# Altium PCB Print3.PcbDoc
Units mm, origin at the board's own origin, x right, y up, seen from the top; angles counter-clockwise.
Board outline 237.62 x 189.1 mm, 2 copper layers (Top Layer, Bottom Layer); 90 components, 0 nets, 288 pads, 0 vias.
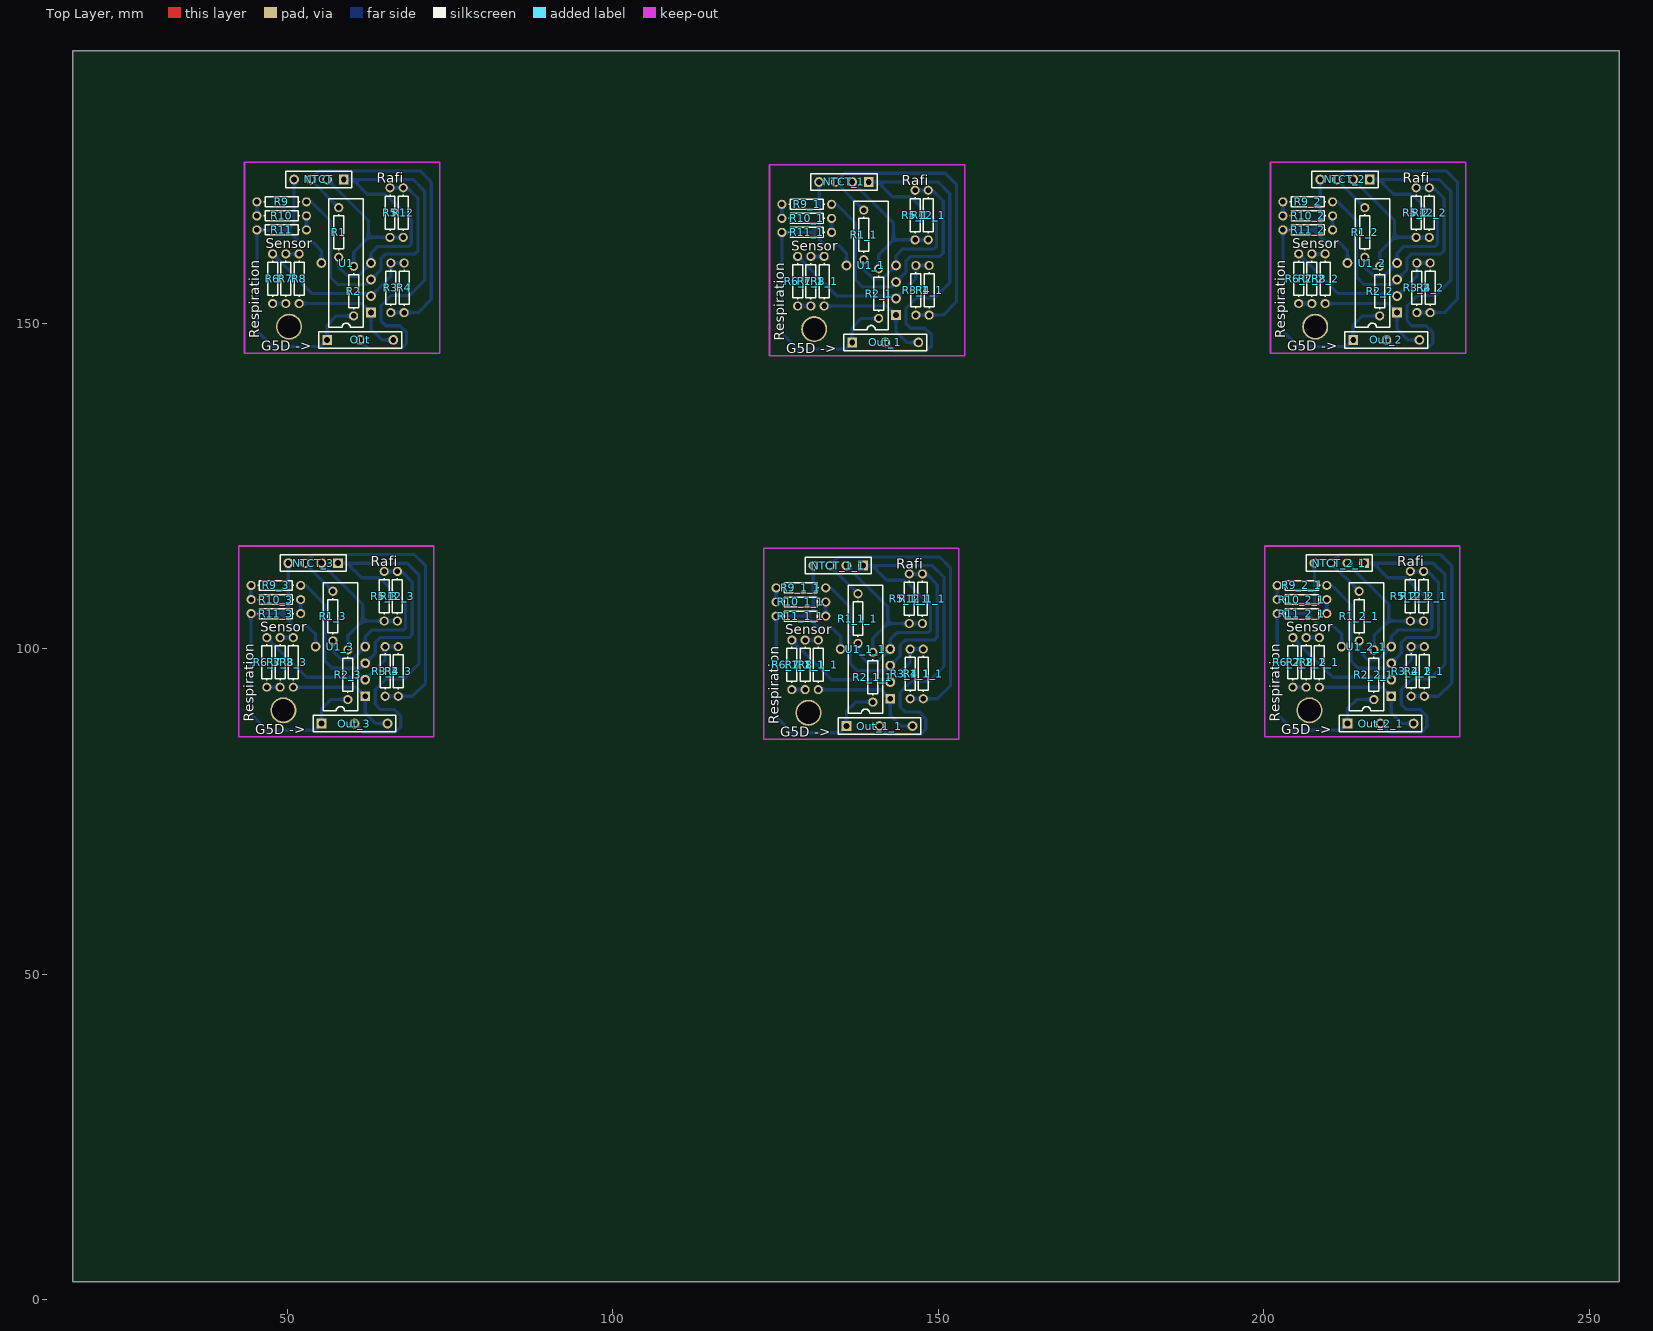
[diagram p0: Top Layer view]
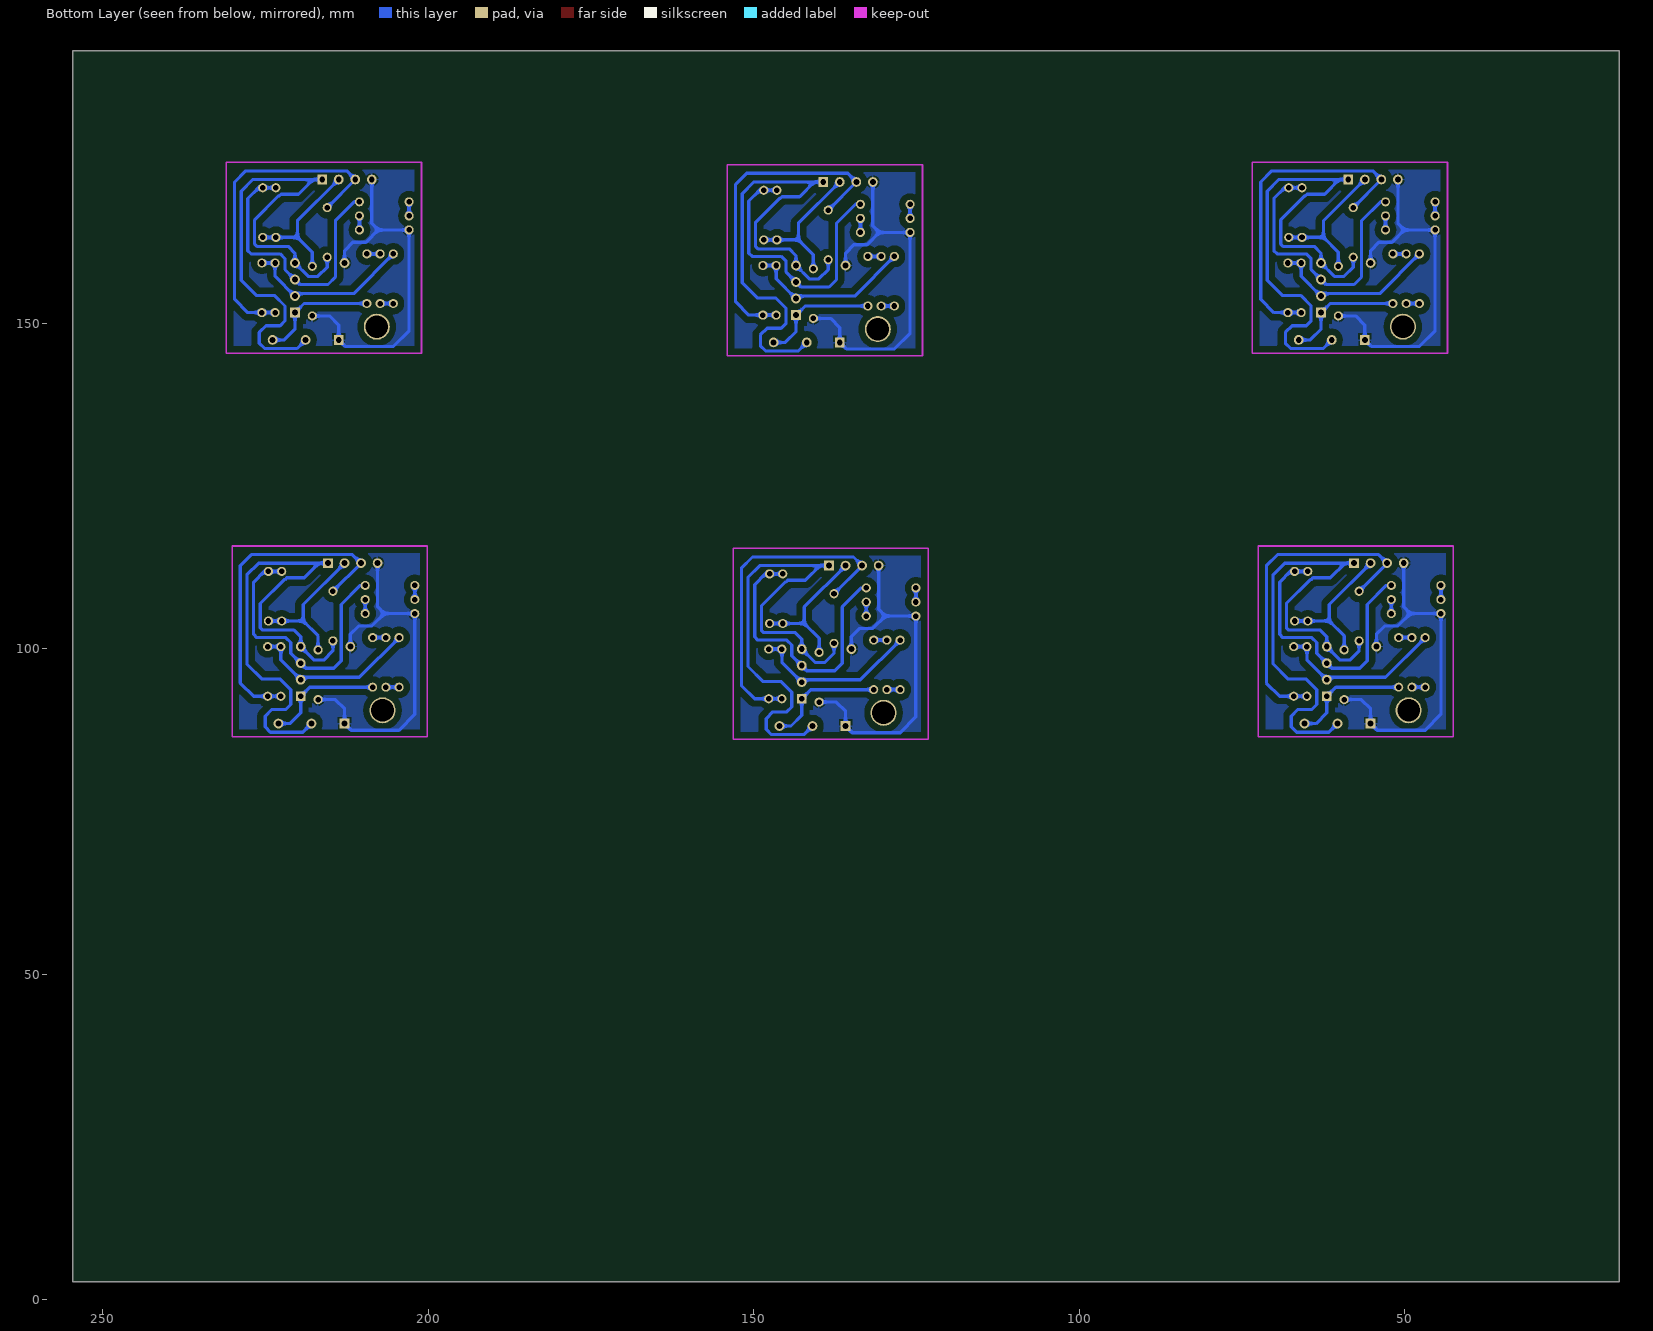
[diagram p1: Bottom Layer view, seen from below]

## Layer stack, top to bottom
Top Solder: solder mask 0.0102, Solder Resist, Dk 3.5
Top Layer: signal copper 0.0356
Dielectric 1: dielectric 0.32, FR-4, Dk 4.8
Bottom Layer: signal copper 0.0356
Bottom Solder: solder mask 0.0102, Solder Resist, Dk 3.5

## Board outline
17.018,2.794 17.018,191.897 254.635,191.897 254.635,2.794

## Design rules (kind name [scope] priority, off if disabled: settings)
Clearance [All] p1: gap=0.25
PolygonConnect [All] p1: connectstyle=Relief reliefconductorwidth=0.254 reliefentries=4 polygonreliefangle="90 Angle" airgapwidth=0.254
RoutingVias [All] p1: holewidth=0.711 width=1.27 viastyle="Through Hole" minholewidth=0.711 minwidth=1.27 maxholewidth=0.711 maxwidth=1.27
SolderMaskExpansion [All] p1: expansion=0.102
Width [All] p1: maxlimit=3 minlimit=0.254 preferedwidth=1
30 further rules are at their usual default settings.

## Components (designator, comment, footprint, x,y, rotation, side; value= is the part's Value field where it differs from the comment)
NTCT "Header 4" HDR1X4 58.674,172.085 r180 top
NTCT_1 "Header 4" HDR1X4 139.319,171.704 r180 top (schematic designator NTCT)
NTCT_1_1 "Header 4" HDR1X4 138.43,112.776 r180 top (schematic designator NTCT)
NTCT_2 "Header 4" HDR1X4 216.281,172.085 r180 top (schematic designator NTCT)
NTCT_2_1 "Header 4" HDR1X4 215.392,113.157 r180 top (schematic designator NTCT)
NTCT_3 "Header 4" HDR1X4 57.785,113.157 r180 top (schematic designator NTCT)
Out "Header 5" HDR1X5 56.134,147.447 r0 top
Out_1 "Header 5" HDR1X5 136.779,147.066 r0 top (schematic designator Out)
Out_1_1 "Header 5" HDR1X5 135.89,88.138 r0 top (schematic designator Out)
Out_2 "Header 5" HDR1X5 213.741,147.447 r0 top (schematic designator Out)
Out_2_1 "Header 5" HDR1X5 212.852,88.519 r0 top (schematic designator Out)
Out_3 "Header 5" HDR1X5 55.245,88.519 r0 top (schematic designator Out)
R1 "10K" AXIAL-0.3 57.912,163.957 r270 top
R1_1 "10K" AXIAL-0.3 138.557,163.576 r270 top (schematic designator R1)
R1_1_1 "10K" AXIAL-0.3 137.668,104.648 r270 top (schematic designator R1)
R1_2 "10K" AXIAL-0.3 215.519,163.957 r270 top (schematic designator R1)
R1_2_1 "10K" AXIAL-0.3 214.63,105.029 r270 top (schematic designator R1)
R1_3 "10K" AXIAL-0.3 57.023,105.029 r270 top (schematic designator R1)
R2 "10K" AXIAL-0.3 60.198,154.94 r270 top
R2_1 "10K" AXIAL-0.3 140.843,154.559 r270 top (schematic designator R2)
R2_1_1 "10K" AXIAL-0.3 139.954,95.631 r270 top (schematic designator R2)
R2_2 "10K" AXIAL-0.3 217.805,154.94 r270 top (schematic designator R2)
R2_2_1 "10K" AXIAL-0.3 216.916,96.012 r270 top (schematic designator R2)
R2_3 "10K" AXIAL-0.3 59.309,96.012 r270 top (schematic designator R2)
R3 "10" AXIAL-0.3 65.913,155.448 r90 top
R3_1 "10" AXIAL-0.3 146.558,155.067 r90 top (schematic designator R3)
R3_1_1 "10" AXIAL-0.3 145.669,96.139 r90 top (schematic designator R3)
R3_2 "10" AXIAL-0.3 223.52,155.448 r90 top (schematic designator R3)
R3_2_1 "10" AXIAL-0.3 222.631,96.52 r90 top (schematic designator R3)
R3_3 "10" AXIAL-0.3 65.024,96.52 r90 top (schematic designator R3)
R4 "10" AXIAL-0.3 67.945,155.448 r90 top
R4_1 "10" AXIAL-0.3 148.59,155.067 r90 top (schematic designator R4)
R4_1_1 "10" AXIAL-0.3 147.701,96.139 r90 top (schematic designator R4)
R4_2 "10" AXIAL-0.3 225.552,155.448 r90 top (schematic designator R4)
R4_2_1 "10" AXIAL-0.3 224.663,96.52 r90 top (schematic designator R4)
R4_3 "10" AXIAL-0.3 67.056,96.52 r90 top (schematic designator R4)
R5 "10" AXIAL-0.3 65.786,167.005 r90 top
R5_1 "10" AXIAL-0.3 146.431,166.624 r90 top (schematic designator R5)
R5_1_1 "10" AXIAL-0.3 145.542,107.696 r90 top (schematic designator R5)
R5_2 "10" AXIAL-0.3 223.393,167.005 r90 top (schematic designator R5)
R5_2_1 "10" AXIAL-0.3 222.504,108.077 r90 top (schematic designator R5)
R5_3 "10" AXIAL-0.3 64.897,108.077 r90 top (schematic designator R5)
R6 "10K" AXIAL-0.3 47.752,156.845 r270 top
R6_1 "10K" AXIAL-0.3 128.397,156.464 r270 top (schematic designator R6)
R6_1_1 "10K" AXIAL-0.3 127.508,97.536 r270 top (schematic designator R6)
R6_2 "10K" AXIAL-0.3 205.359,156.845 r270 top (schematic designator R6)
R6_2_1 "10K" AXIAL-0.3 204.47,97.917 r270 top (schematic designator R6)
R6_3 "10K" AXIAL-0.3 46.863,97.917 r270 top (schematic designator R6)
R7 "10K" AXIAL-0.3 49.784,156.845 r90 top
R7_1 "10K" AXIAL-0.3 130.429,156.464 r90 top (schematic designator R7)
R7_1_1 "10K" AXIAL-0.3 129.54,97.536 r90 top (schematic designator R7)
R7_2 "10K" AXIAL-0.3 207.391,156.845 r90 top (schematic designator R7)
R7_2_1 "10K" AXIAL-0.3 206.502,97.917 r90 top (schematic designator R7)
R7_3 "10K" AXIAL-0.3 48.895,97.917 r90 top (schematic designator R7)
R8 "10K" AXIAL-0.3 51.816,156.845 r270 top
R8_1 "10K" AXIAL-0.3 132.461,156.464 r270 top (schematic designator R8)
R8_1_1 "10K" AXIAL-0.3 131.572,97.536 r270 top (schematic designator R8)
R8_2 "10K" AXIAL-0.3 209.423,156.845 r270 top (schematic designator R8)
R8_2_1 "10K" AXIAL-0.3 208.534,97.917 r270 top (schematic designator R8)
R8_3 "10K" AXIAL-0.3 50.927,97.917 r270 top (schematic designator R8)
R9 "10K" AXIAL-0.3 49.149,168.656 r180 top
R9_1 "10K" AXIAL-0.3 129.794,168.275 r180 top (schematic designator R9)
R9_1_1 "10K" AXIAL-0.3 128.905,109.347 r180 top (schematic designator R9)
R9_2 "10K" AXIAL-0.3 206.756,168.656 r180 top (schematic designator R9)
R9_2_1 "10K" AXIAL-0.3 205.867,109.728 r180 top (schematic designator R9)
R9_3 "10K" AXIAL-0.3 48.26,109.728 r180 top (schematic designator R9)
R10 "10K" AXIAL-0.3 49.149,166.497 r0 top
R10_1 "10K" AXIAL-0.3 129.794,166.116 r0 top (schematic designator R10)
R10_1_1 "10K" AXIAL-0.3 128.905,107.188 r0 top (schematic designator R10)
R10_2 "10K" AXIAL-0.3 206.756,166.497 r0 top (schematic designator R10)
R10_2_1 "10K" AXIAL-0.3 205.867,107.569 r0 top (schematic designator R10)
R10_3 "10K" AXIAL-0.3 48.26,107.569 r0 top (schematic designator R10)
R11 "10K" AXIAL-0.3 49.149,164.338 r180 top
R11_1 "10K" AXIAL-0.3 129.794,163.957 r180 top (schematic designator R11)
R11_1_1 "10K" AXIAL-0.3 128.905,105.029 r180 top (schematic designator R11)
R11_2 "10K" AXIAL-0.3 206.756,164.338 r180 top (schematic designator R11)
R11_2_1 "10K" AXIAL-0.3 205.867,105.41 r180 top (schematic designator R11)
R11_3 "10K" AXIAL-0.3 48.26,105.41 r180 top (schematic designator R11)
R12 "10" AXIAL-0.3 67.818,167.005 r90 top
R12_1 "10" AXIAL-0.3 148.463,166.624 r90 top (schematic designator R12)
R12_1_1 "10" AXIAL-0.3 147.574,107.696 r90 top (schematic designator R12)
R12_2 "10" AXIAL-0.3 225.425,167.005 r90 top (schematic designator R12)
R12_2_1 "10" AXIAL-0.3 224.536,108.077 r90 top (schematic designator R12)
R12_3 "10" AXIAL-0.3 66.929,108.077 r90 top (schematic designator R12)
U1 "TL074N" N014 59.055,159.258 r90 top
U1_1 "TL074N" N014 139.7,158.877 r90 top (schematic designator U1)
U1_1_1 "TL074N" N014 138.811,99.949 r90 top (schematic designator U1)
U1_2 "TL074N" N014 216.662,159.258 r90 top (schematic designator U1)
U1_2_1 "TL074N" N014 215.773,100.33 r90 top (schematic designator U1)
U1_3 "TL074N" N014 58.166,100.33 r90 top (schematic designator U1)

## Footprints (in the part's own frame and the unit in brackets; to place one, negate y for a bottom-side part, rotate by r counter-clockwise, add the part's x,y. Pads: shape width x height; smd on the part's side, far side on the other; paste and mask are expansions set on the pad)
AXIAL-0.3 [mm] "Axial Device, Thru-Hole; 2 Leads; 0.3 in Pin Spacing"
  round 1.4 hole 0.85: 1(-3.81,0) 2(3.81,0)
  silkscreen extent -2.77,-0.76 2.77,0.76
HDR1X4 [mm] "Connector; Header; 4 Position"
  rect 1.5x1.5 hole 0.9: 1(0,0)
  round 1.5 hole 0.9: 2(2.54,0) 3(5.08,0) 4(7.62,0)
  silkscreen extent -1.27,-1.27 8.89,1.27
HDR1X5 [mm] "Connector; Header; 5 Position"
  rect 1.5x1.5 hole 0.9: 1(0,0)
  round 0 all layers, no hole: 2(2.54,0) 4(7.62,0)
  round 1.5 hole 0.9: 3(5.08,0) 5(10.16,0)
  silkscreen extent -1.27,-1.27 11.43,1.27
N014 [mm] "DIP; 14 Leads; Row Spacing 7.62 mm; Pitch 2.54 mm"
  rect 1.5x1.5 hole 0.9: 1(-7.62,-3.81)
  round 1.5 hole 0.9: 2(-5.08,-3.81) 3(-2.54,-3.81) 4(0,-3.81) 11(0,3.81)
  round 0 all layers, no hole: 5(2.54,-3.81) 6(5.08,-3.81) 7(7.62,-3.81) 8(7.62,3.81) 9(5.08,3.81) 10(2.54,3.81) 12(-2.54,3.81) 13(-5.08,3.81) 14(-7.62,3.81)
  silkscreen extent -9.85,-2.65 9.85,2.65

## Part data
NTCT NTCT_1 NTCT_1_1 NTCT_2 NTCT_2_1 NTCT_3: "Header, 4-Pin"
Out Out_1 Out_1_1 Out_2 Out_2_1 Out_3: "Header, 5-Pin"
R1 R1_1 R1_1_1 R1_2 R1_2_1 R1_3 R2 R2_1 R2_1_1 R2_2 R2_2_1 R2_3 R3 R3_1 R3_1_1 R3_2 R3_2_1 R3_3 R4 R4_1 R4_1_1 R4_2 R4_2_1 R4_3 R5 R5_1 R5_1_1 R5_2 R5_2_1 R5_3 R6 R6_1 R6_1_1 R6_2 R6_2_1 R6_3 R7 R7_1 R7_1_1 R7_2 R7_2_1 R7_3 R8 R8_1 R8_1_1 R8_2 R8_2_1 R8_3 R9 R9_1 R9_1_1 R9_2 R9_2_1 R9_3 R10 R10_1 R10_1_1 R10_2 R10_2_1 R10_3 R11 R11_1 R11_1_1 R11_2 R11_2_1 R11_3 R12 R12_1 R12_1_1 R12_2 R12_2_1 R12_3: library part Res1, "Resistor"
U1 U1_1 U1_1_1 U1_2 U1_2_1 U1_3: "Low-Noise JFET-Input Operational Amplifier"

## Free pads (board coordinates)
  round 4 hole 3.5: 8(49.403,90.551) 8(50.292,149.479) 8(130.048,90.17) 8(130.937,149.098) 8(207.01,90.551) 8(207.899,149.479)

## Nets (pads, with @x,y where several pads share a name; then routed paths per layer and width w, separated by ;. In a path a pad name is that pad's centre, name@x,y a point inside that pad or via, vN(x,y) a via of type N, cw(c..) or ccw(c..) an arc to the next point about the centre after c; other vN are vias at no path point)
pads on no net: NTCT.1 NTCT.2 NTCT.3 NTCT.4 NTCT_1.1 NTCT_1.2 NTCT_1.3 NTCT_1.4 NTCT_1_1.1 NTCT_1_1.2 NTCT_1_1.3 NTCT_1_1.4 NTCT_2.1 NTCT_2.2 NTCT_2.3 NTCT_2.4 NTCT_2_1.1 NTCT_2_1.2 NTCT_2_1.3 NTCT_2_1.4 NTCT_3.1 NTCT_3.2 NTCT_3.3 NTCT_3.4 Out.1 Out.2 Out.3 Out.4 Out.5 Out_1.1 Out_1.2 Out_1.3 Out_1.4 Out_1.5 Out_1_1.1 Out_1_1.2 Out_1_1.3 Out_1_1.4 Out_1_1.5 Out_2.1 Out_2.2 Out_2.3 Out_2.4 Out_2.5 Out_2_1.1 Out_2_1.2 Out_2_1.3 Out_2_1.4 Out_2_1.5 Out_3.1 Out_3.2 Out_3.3 Out_3.4 Out_3.5 R1.1 R1.2 R1_1.1 R1_1.2 R1_1_1.1 R1_1_1.2 R1_2.1 R1_2.2 R1_2_1.1 R1_2_1.2 R1_3.1 R1_3.2 R2.1 R2.2 R2_1.1 R2_1.2 R2_1_1.1 R2_1_1.2 R2_2.1 R2_2.2 R2_2_1.1 R2_2_1.2 R2_3.1 R2_3.2 R3.1 R3.2 R3_1.1 R3_1.2 R3_1_1.1 R3_1_1.2 R3_2.1 R3_2.2 R3_2_1.1 R3_2_1.2 R3_3.1 R3_3.2 R4.1 R4.2 R4_1.1 R4_1.2 R4_1_1.1 R4_1_1.2 R4_2.1 R4_2.2 R4_2_1.1 R4_2_1.2 R4_3.1 R4_3.2 R5.1 R5.2 R5_1.1 R5_1.2 R5_1_1.1 R5_1_1.2 R5_2.1 R5_2.2 R5_2_1.1 R5_2_1.2 R5_3.1 R5_3.2 R6.1 R6.2 R6_1.1 R6_1.2 R6_1_1.1 R6_1_1.2 R6_2.1 R6_2.2 R6_2_1.1 R6_2_1.2 R6_3.1 R6_3.2 R7.1 R7.2 R7_1.1 R7_1.2 R7_1_1.1 R7_1_1.2 R7_2.1 R7_2.2 R7_2_1.1 R7_2_1.2 R7_3.1 R7_3.2 R8.1 R8.2 R8_1.1 R8_1.2 R8_1_1.1 R8_1_1.2 R8_2.1 R8_2.2 R8_2_1.1 R8_2_1.2 R8_3.1 R8_3.2 R9.1 R9.2 R9_1.1 R9_1.2 R9_1_1.1 R9_1_1.2 R9_2.1 R9_2.2 R9_2_1.1 R9_2_1.2 R9_3.1 R9_3.2 R10.1 R10.2 R10_1.1 R10_1.2 R10_1_1.1 R10_1_1.2 R10_2.1 R10_2.2 R10_2_1.1 R10_2_1.2 R10_3.1 R10_3.2 R11.1 R11.2 R11_1.1 R11_1.2 R11_1_1.1 R11_1_1.2 R11_2.1 R11_2.2 R11_2_1.1 R11_2_1.2 R11_3.1 R11_3.2 R12.1 R12.2 R12_1.1 R12_1.2 R12_1_1.1 R12_1_1.2 R12_2.1 R12_2.2 R12_2_1.1 R12_2_1.2 R12_3.1 R12_3.2 U1.1 U1.2 U1.3 U1.4 U1.5 U1.6 U1.7 U1.8 U1.9 U1.10 U1.11 U1.12 U1.13 U1.14 U1_1.1 U1_1.2 U1_1.3 U1_1.4 U1_1.5 U1_1.6 U1_1.7 U1_1.8 U1_1.9 U1_1.10 U1_1.11 U1_1.12 U1_1.13 U1_1.14 U1_1_1.1 U1_1_1.2 U1_1_1.3 U1_1_1.4 U1_1_1.5 U1_1_1.6 U1_1_1.7 U1_1_1.8 U1_1_1.9 U1_1_1.10 U1_1_1.11 U1_1_1.12 U1_1_1.13 U1_1_1.14 U1_2.1 U1_2.2 U1_2.3 U1_2.4 U1_2.5 U1_2.6 U1_2.7 U1_2.8 U1_2.9 U1_2.10 U1_2.11 U1_2.12 U1_2.13 U1_2.14 U1_2_1.1 U1_2_1.2 U1_2_1.3 U1_2_1.4 U1_2_1.5 U1_2_1.6 U1_2_1.7 U1_2_1.8 U1_2_1.9 U1_2_1.10 U1_2_1.11 U1_2_1.12 U1_2_1.13 U1_2_1.14 U1_3.1 U1_3.2 U1_3.3 U1_3.4 U1_3.5 U1_3.6 U1_3.7 U1_3.8 U1_3.9 U1_3.10 U1_3.11 U1_3.12 U1_3.13 U1_3.14
copper on no net: | length 1865.6
  Bottom Layer w0.5: 44.45,105.41 49.149,105.41 ; 44.45,107.569 44.45,109.728 ; 44.577,105.283 44.45,105.156 44.45,89.916 46.863,87.503 54.229,87.503 55.245,88.519 55.245,90.78 56.667,92.202 59.309,92.202 ; 45.339,164.338 50.038,164.338 ; 45.339,166.497 45.339,168.656 ; 45.466,164.211 45.339,164.084 45.339,148.844 47.752,146.431 55.118,146.431 56.134,147.447 56.134,149.708 57.556,151.13 60.198,151.13 ; 46.863,94.107 48.895,94.107 ; 46.863,101.727 52.959,95.631 61.595,95.631 61.976,95.25 65.024,98.298 65.024,100.33 67.056,100.33 ; 47.752,153.035 49.784,153.035 ; 47.752,160.655 53.848,154.559 62.484,154.559 62.865,154.178 65.913,157.226 65.913,159.258 67.945,159.258 ; 48.895,101.727 50.927,101.727 ; 49.784,160.655 51.816,160.655 ; 50.165,113.157 50.165,106.426 49.149,105.41 ; 50.927,94.107 60.579,94.107 61.976,92.71 61.976,90.17 63.627,88.519 65.405,88.519 ; 51.054,172.085 51.054,165.354 50.038,164.338 ; 51.816,153.035 61.468,153.035 62.865,151.638 62.865,149.098 64.516,147.447 66.294,147.447 ; 52.07,105.41 52.07,107.569 ; 52.07,109.728 52.832,109.728 55.753,106.807 55.753,98.171 56.897,97.027 61.213,97.027 61.976,97.79 63.5,99.314 63.5,100.965 64.262,101.727 68.725,101.727 69.215,102.217 69.215,110.236 67.564,111.887 66.929,111.887 64.897,111.887 ; 52.959,164.338 52.959,166.497 ; 52.959,168.656 53.721,168.656 56.642,165.735 56.642,157.099 57.786,155.955 62.102,155.955 62.865,156.718 64.389,158.242 64.389,159.893 65.151,160.655 69.614,160.655 70.104,161.145 70.104,169.164 68.453,170.815 67.818,170.815 65.786,170.815 ; 54.356,100.33 54.356,102.235 53.086,103.505 51.054,103.505 49.149,105.41 ; 55.245,113.157 61.595,106.807 61.595,104.267 ; 55.245,159.258 55.245,161.163 53.975,162.433 51.943,162.433 50.038,164.338 ; 56.134,172.085 62.484,165.735 62.484,163.195 ; 57.023,101.219 57.023,99.695 58.445,98.273 59.919,98.273 61.976,100.33 61.976,101.854 62.992,102.87 67.818,102.87 68.179,103.231 68.179,106.954 64.496,110.637 64.379,110.637 64.111,110.905 61.424,110.905 59.172,113.157 ; 57.023,108.839 52.705,113.157 54.026,114.478 69.545,114.478 71.247,112.776 71.247,94.742 69.215,92.71 65.024,92.71 67.056,92.71 ; 57.785,113.157 59.172,113.157 ; 57.912,160.147 57.912,158.623 59.334,157.201 60.808,157.201 62.865,159.258 62.865,160.782 63.881,161.798 68.707,161.798 69.068,162.159 69.068,165.882 65.385,169.565 65.268,169.565 65,169.833 62.313,169.833 60.061,172.085 ; 57.912,167.767 53.594,172.085 54.915,173.406 70.434,173.406 72.136,171.704 72.136,153.67 70.104,151.638 65.913,151.638 67.945,151.638 ; 58.674,172.085 60.061,172.085 ; 59.309,99.822 59.309,101.981 61.595,104.267 ; 60.198,158.75 60.198,160.909 62.484,163.195 ; 60.325,88.519 61.646,87.198 66.624,87.198 67.437,88.011 67.437,89.662 66.421,90.678 64.262,90.678 63.5,91.44 63.5,93.726 65.119,95.345 67.913,95.345 70.231,97.663 70.231,111.379 68.453,113.157 59.172,113.157 ; 61.214,147.447 62.535,146.126 67.513,146.126 68.326,146.939 68.326,148.59 67.31,149.606 65.151,149.606 64.389,150.368 64.389,152.654 66.008,154.273 68.802,154.273 71.12,156.591 71.12,170.307 69.342,172.085 60.061,172.085 ; 66.929,104.267 61.595,104.267 ; 67.818,163.195 62.484,163.195 ; 125.095,105.029 129.794,105.029 ; 125.095,107.188 125.095,109.347 ; 125.222,104.902 125.095,104.775 125.095,89.535 127.508,87.122 134.874,87.122 135.89,88.138 135.89,90.399 137.312,91.821 139.954,91.821 ; 125.984,163.957 130.683,163.957 ; 125.984,166.116 125.984,168.275 ; 126.111,163.83 125.984,163.703 125.984,148.463 128.397,146.05 135.763,146.05 136.779,147.066 136.779,149.327 138.201,150.749 140.843,150.749 ; 127.508,93.726 129.54,93.726 ; 127.508,101.346 133.604,95.25 142.24,95.25 142.621,94.869 145.669,97.917 145.669,99.949 147.701,99.949 ; 128.397,152.654 130.429,152.654 ; 128.397,160.274 134.493,154.178 143.129,154.178 143.51,153.797 146.558,156.845 146.558,158.877 148.59,158.877 ; 129.54,101.346 131.572,101.346 ; 130.429,160.274 132.461,160.274 ; 130.81,112.776 130.81,106.045 129.794,105.029 ; 131.572,93.726 141.224,93.726 142.621,92.329 142.621,89.789 144.272,88.138 146.05,88.138 ; 131.699,171.704 131.699,164.973 130.683,163.957 ; 132.461,152.654 142.113,152.654 143.51,151.257 143.51,148.717 145.161,147.066 146.939,147.066 ; 132.715,105.029 132.715,107.188 ; 132.715,109.347 133.477,109.347 136.398,106.426 136.398,97.79 137.542,96.646 141.858,96.646 142.621,97.409 144.145,98.933 144.145,100.584 144.907,101.346 149.37,101.346 149.86,101.836 149.86,109.855 148.209,111.506 147.574,111.506 145.542,111.506 ; 133.604,163.957 133.604,166.116 ; 133.604,168.275 134.366,168.275 137.287,165.354 137.287,156.718 138.431,155.574 142.747,155.574 143.51,156.337 145.034,157.861 145.034,159.512 145.796,160.274 150.259,160.274 150.749,160.764 150.749,168.783 149.098,170.434 148.463,170.434 146.431,170.434 ; 135.001,99.949 135.001,101.854 133.731,103.124 131.699,103.124 129.794,105.029 ; 135.89,112.776 142.24,106.426 142.24,103.886 ; 135.89,158.877 135.89,160.782 134.62,162.052 132.588,162.052 130.683,163.957 ; 136.779,171.704 143.129,165.354 143.129,162.814 ; 137.668,100.838 137.668,99.314 139.09,97.892 140.564,97.892 142.621,99.949 142.621,101.473 143.637,102.489 148.463,102.489 148.824,102.85 148.824,106.573 145.141,110.256 145.024,110.256 144.756,110.524 142.069,110.524 139.817,112.776 ; 137.668,108.458 133.35,112.776 134.671,114.097 150.19,114.097 151.892,112.395 151.892,94.361 149.86,92.329 145.669,92.329 147.701,92.329 ; 138.43,112.776 139.817,112.776 ; 138.557,159.766 138.557,158.242 139.979,156.82 141.453,156.82 143.51,158.877 143.51,160.401 144.526,161.417 149.352,161.417 149.713,161.778 149.713,165.501 146.03,169.184 145.913,169.184 145.645,169.452 142.958,169.452 140.706,171.704 ; 138.557,167.386 134.239,171.704 135.56,173.025 151.079,173.025 152.781,171.323 152.781,153.289 150.749,151.257 146.558,151.257 148.59,151.257 ; 139.319,171.704 140.706,171.704 ; 139.954,99.441 139.954,101.6 142.24,103.886 ; 140.843,158.369 140.843,160.528 143.129,162.814 ; 140.97,88.138 142.291,86.817 147.269,86.817 148.082,87.63 148.082,89.281 147.066,90.297 144.907,90.297 144.145,91.059 144.145,93.345 145.764,94.964 148.558,94.964 150.876,97.282 150.876,110.998 149.098,112.776 139.817,112.776 ; 141.859,147.066 143.18,145.745 148.158,145.745 148.971,146.558 148.971,148.209 147.955,149.225 145.796,149.225 145.034,149.987 145.034,152.273 146.653,153.892 149.447,153.892 151.765,156.21 151.765,169.926 149.987,171.704 140.706,171.704 ; 147.574,103.886 142.24,103.886 ; 148.463,162.814 143.129,162.814 ; 202.057,105.41 206.756,105.41 ; 202.057,107.569 202.057,109.728 ; 202.184,105.283 202.057,105.156 202.057,89.916 204.47,87.503 211.836,87.503 212.852,88.519 212.852,90.78 214.274,92.202 216.916,92.202 ; 202.946,164.338 207.645,164.338 ; 202.946,166.497 202.946,168.656 ; 203.073,164.211 202.946,164.084 202.946,148.844 205.359,146.431 212.725,146.431 213.741,147.447 213.741,149.708 215.163,151.13 217.805,151.13 ; 204.47,94.107 206.502,94.107 ; 204.47,101.727 210.566,95.631 219.202,95.631 219.583,95.25 222.631,98.298 222.631,100.33 224.663,100.33 ; 205.359,153.035 207.391,153.035 ; 205.359,160.655 211.455,154.559 220.091,154.559 220.472,154.178 223.52,157.226 223.52,159.258 225.552,159.258 ; 206.502,101.727 208.534,101.727 ; 207.391,160.655 209.423,160.655 ; 207.772,113.157 207.772,106.426 206.756,105.41 ; 208.534,94.107 218.186,94.107 219.583,92.71 219.583,90.17 221.234,88.519 223.012,88.519 ; 208.661,172.085 208.661,165.354 207.645,164.338 ; 209.423,153.035 219.075,153.035 220.472,151.638 220.472,149.098 222.123,147.447 223.901,147.447 ; 209.677,105.41 209.677,107.569 ; 209.677,109.728 210.439,109.728 213.36,106.807 213.36,98.171 214.504,97.027 218.82,97.027 219.583,97.79 221.107,99.314 221.107,100.965 221.869,101.727 226.332,101.727 226.822,102.217 226.822,110.236 225.171,111.887 224.536,111.887 222.504,111.887 ; 210.566,164.338 210.566,166.497 ; 210.566,168.656 211.328,168.656 214.249,165.735 214.249,157.099 215.393,155.955 219.709,155.955 220.472,156.718 221.996,158.242 221.996,159.893 222.758,160.655 227.221,160.655 227.711,161.145 227.711,169.164 226.06,170.815 225.425,170.815 223.393,170.815 ; 211.963,100.33 211.963,102.235 210.693,103.505 208.661,103.505 206.756,105.41 ; 212.852,113.157 219.202,106.807 219.202,104.267 ; 212.852,159.258 212.852,161.163 211.582,162.433 209.55,162.433 207.645,164.338 ; 213.741,172.085 220.091,165.735 220.091,163.195 ; 214.63,101.219 214.63,99.695 216.052,98.273 217.526,98.273 219.583,100.33 219.583,101.854 220.599,102.87 225.425,102.87 225.786,103.231 225.786,106.954 222.103,110.637 221.986,110.637 221.718,110.905 219.031,110.905 216.779,113.157 ; 214.63,108.839 210.312,113.157 211.633,114.478 227.152,114.478 228.854,112.776 228.854,94.742 226.822,92.71 222.631,92.71 224.663,92.71 ; 215.392,113.157 216.779,113.157 ; 215.519,160.147 215.519,158.623 216.941,157.201 218.415,157.201 220.472,159.258 220.472,160.782 221.488,161.798 226.314,161.798 226.675,162.159 226.675,165.882 222.992,169.565 222.875,169.565 222.607,169.833 219.92,169.833 217.668,172.085 ; 215.519,167.767 211.201,172.085 212.522,173.406 228.041,173.406 229.743,171.704 229.743,153.67 227.711,151.638 223.52,151.638 225.552,151.638 ; 216.281,172.085 217.668,172.085 ; 216.916,99.822 216.916,101.981 219.202,104.267 ; 217.805,158.75 217.805,160.909 220.091,163.195 ; 217.932,88.519 219.253,87.198 224.231,87.198 225.044,88.011 225.044,89.662 224.028,90.678 221.869,90.678 221.107,91.44 221.107,93.726 222.726,95.345 225.52,95.345 227.838,97.663 227.838,111.379 226.06,113.157 216.779,113.157 ; 218.821,147.447 220.142,146.126 225.12,146.126 225.933,146.939 225.933,148.59 224.917,149.606 222.758,149.606 221.996,150.368 221.996,152.654 223.615,154.273 226.409,154.273 228.727,156.591 228.727,170.307 226.949,172.085 217.668,172.085 ; 224.536,104.267 219.202,104.267 ; 225.425,163.195 220.091,163.195

## Polygon pours and split planes (outlines as drawn)
no net on Bottom Layer "Bottom Layer-GND" (solid, pour order 15): 42.545,115.799 72.517,115.799 72.517,86.487 42.545,86.487 42.545,115.799
no net on Bottom Layer "Bottom Layer-GND" (solid, pour order 15): 123.19,115.418 153.162,115.418 153.162,86.106 123.19,86.106 123.19,115.418
no net on Bottom Layer "Bottom Layer-GND" (solid, pour order 15): 200.152,115.799 230.124,115.799 230.124,86.487 200.152,86.487 200.152,115.799
no net on Bottom Layer "Bottom Layer-GND" (solid, pour order 15): 201.041,174.727 231.013,174.727 231.013,145.415 201.041,145.415 201.041,174.727
no net on Bottom Layer "Bottom Layer-GND" (solid, pour order 15): 124.079,174.346 154.051,174.346 154.051,145.034 124.079,145.034 124.079,174.346
no net on Bottom Layer "Bottom Layer-GND" (solid, pour order 15): 43.434,174.727 73.406,174.727 73.406,145.415 43.434,145.415 43.434,174.727

## Keep-outs
Keep-Out Layer:
  lines w0.254: 42.545,86.487 72.517,86.487 72.517,115.799 42.545,115.799 42.545,86.487 ; 43.434,145.415 43.434,174.727 73.406,174.727 73.406,145.415 43.434,145.415 ; 123.19,86.106 153.162,86.106 153.162,115.418 123.19,115.418 123.19,86.106 ; 124.079,145.034 124.079,174.346 154.051,174.346 154.051,145.034 124.079,145.034 ; 200.152,86.487 230.124,86.487 230.124,115.799 200.152,115.799 200.152,86.487 ; 201.041,145.415 201.041,174.727 231.013,174.727 231.013,145.415 201.041,145.415

## Silkscreen, mask and mechanical layers (free items; w line width, h text height)
Top Overlay:
  text "Rafi" at 63.754,171.577 h1.52
  text "Rafi" at 221.361,171.577 h1.52
  text "Rafi" at 144.399,171.196 h1.52
  text "Sensor" at 46.736,161.544 h1.52
  text "Sensor" at 204.343,161.544 h1.52
  text "Sensor" at 127.381,161.163 h1.52
  text "Respiration" at 45.72,147.701 h1.52 r90
  text "Respiration" at 203.327,147.701 h1.52 r90
  text "Respiration" at 126.365,147.32 h1.52 r90
  text "G5D ->" at 45.974,145.796 h1.52
  text "G5D ->" at 203.581,145.796 h1.52
  text "G5D ->" at 126.619,145.415 h1.52
  text "Rafi" at 62.865,112.649 h1.52
  text "Rafi" at 220.472,112.649 h1.52
  text "Rafi" at 143.51,112.268 h1.52
  text "Sensor" at 45.847,102.616 h1.52
  text "Sensor" at 203.454,102.616 h1.52
  text "Sensor" at 126.492,102.235 h1.52
  text "Respiration" at 44.831,88.773 h1.52 r90
  text "Respiration" at 202.438,88.773 h1.52 r90
  text "Respiration" at 125.476,88.392 h1.52 r90
  text "G5D ->" at 45.085,86.868 h1.52
  text "G5D ->" at 202.692,86.868 h1.52
  text "G5D ->" at 125.73,86.487 h1.52